# Allegro board CHZC-02.brd
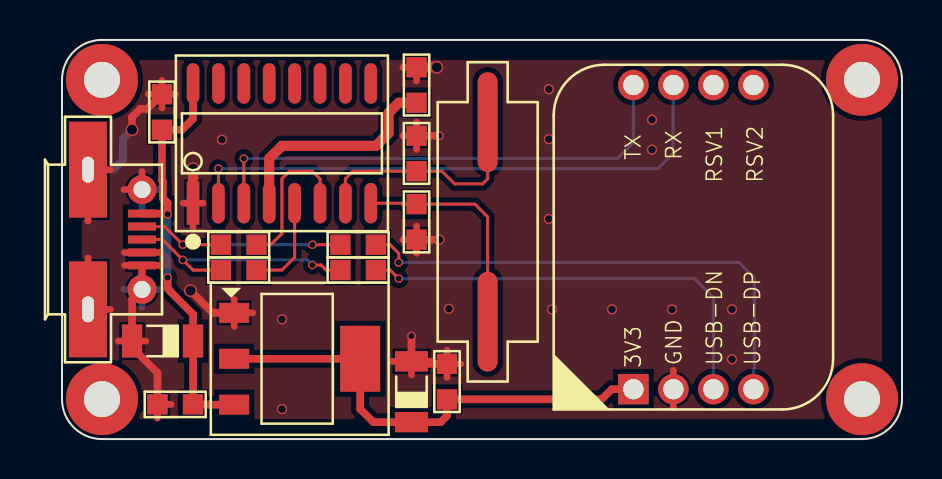
[diagram p0: board, top side]
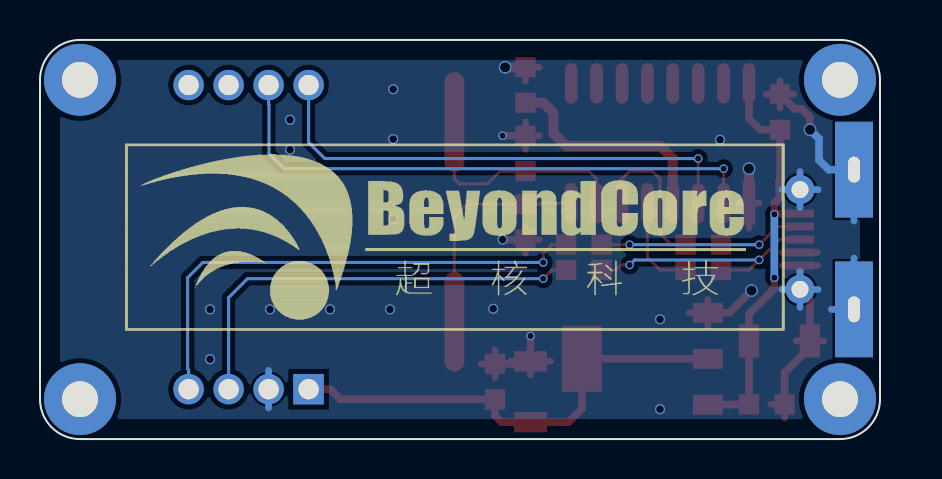
[diagram p1: board, bottom side, seen from below]

Outline 42 x 20 mm; copper layers: TOP, BOTTOM. Coordinates in mm from the lower left corner of the outline.
Outline path: 0,18 0,2 arc(0.59,0.59) 2,0 40,0 arc(41.41,0.59) 42,2 42,18 arc(41.41,19.41) 40,20 2,20 arc(0.59,19.41) 0,18

## Placement (name value [footprint] x y rotation side)
C1  100 nF  [SC0603]  5 15.5 90 top
C2  1 uF  [SC0603]  17.73 16.85 90 top
C3  22 pF  [SC0603]  17.73 15.2 270 top
C4  22 pF  [SC0603]  17.73 9.99 90 top
C5  22 uF/16V  [SC1206]  5.03 4.91 180 top
C6  100 nF  [SC0603]  6.55 1.74 180 top
C7  22 uF/16V  [SC1206]  17.47 2.37 90 top
C8  100 nF  [SC0603]  19.25 1.99 90 top
H1  OBLONG HOLE x 1.6mm  [M-3_6-D1_80-MM]  2 18 0 top
H2  OBLONG HOLE x 1.6mm  [M-3_6-D1_80-MM]  2 2 0 top
H3  OBLONG HOLE x 1.6mm  [M-3_6-D1_80-MM]  40 2 0 top
H4  OBLONG HOLE x 1.6mm  [M-3_6-D1_80-MM]  40 18 0 top
J1  MICRO-USB-B  [MICRO-USB-B-THU]  4 10 270 top
M1  CHZT-02  [CHZT-02-THU]  31.57 10.12 90 top
R1  0 R  [SR0603]  7.95 8.47 0 top
R2  0 R  [SR0603]  7.95 9.74 0 top
R3  DNP  [SR0603]  13.92 8.47 0 top
R4  DNP  [SR0603]  13.92 9.74 0 top
U1  CH340G  [SOP-16]  11 14.82 90 top
U2  AMS1117  [SOT223-3]  11.76 4.02 270 top
Y1  12 MHz  [HC-49SMD]  21.28 10.88 270 top

## Library data of the parts
C1-C4 C6 C8 = Capacity_Nonpolarity
C5 C7 = Capacity_TANT
H1-H4 = HOLE
J1 = MICRO-USB
M1 = CHZT-02
R1-R4 = Res
U1 = CH340G
U2 = AMS1117
Y1 = CRYSTAL

## Footprints (pads in the part's own frame, mm; a bottom-side part is the same pattern mirrored in y, then rotated)
CHZT-02-THU
  rect 1.524x1.524 hole 1.016: 1(-7.62,3)
  round 1.524 hole 1.016: 2(-7.62,1) 3(-7.62,-1) 4(-7.62,-3) 5(7.62,-3) 6(7.62,-1) 7(7.62,1) 8(7.62,3)
HC-49SMD
  oval 5x1 smd: 1(-5,0) 2(5,0)
M-3_6-D1_80-MM
  round 3.6 hole 1.8: 1(0,0)
MICRO-USB-B-THU
  rect 0.4x1.4 smd: 1(-1.3,0) 2(-0.65,0) 3(0,0) 4(0.65,0) 5(1.3,0)
  round 1.45 hole 0.85: 6(2.5,0) 9(-2.5,0)
  rect 4.8x1.9 hole 1.3x0.6: 7(3.5,-2.7) 8(-3.5,-2.7)
SC0603
  rect 1.016x1.016 smd: 1(0,0) 2(1.778,0)
SC1206
  rect 1.016x1.651 smd: 1(-1.524,0) 2(1.524,0)
SOP-16
  rect 2.159x0.635 smd: 1(-3,4.445)
  oval 2.032x0.635 smd: 2(-3,3.175) 3(-3,1.905) 4(-3,0.635) 5(-3,-0.635) 6(-3,-1.905) 7(-3,-3.175) 8(-3,-4.445) 9(3,-4.445) 10(3,-3.175) 11(3,-1.905) 12(3,-0.635) 13(3,0.635) 14(3,1.905) 15(3,3.175) 16(3,4.445)
SOT223-3
  rect 1x1.5 smd: 1(-2.3,-3.15) 2(0,-3.15) 3(2.3,-3.15)
  rect 3.3x2 smd: 4(0,3.15)
SR0603
  rect 1.016x1.016 smd: 1(0,0) 2(1.778,0)

## Nets
D3V3: C7.1(+) C8.1 M1.1(VCC) U2.2(VOUT) U2.4(OUT)
D5V: C1.1 C5.1(+) C6.1 J1.1(VBUS) U1.16(VCC) U2.3(VIN)
GND: C1.2 C2.2 C3.1 C4.1 C5.2(-) C6.2 C7.2(-) C8.2 J1.4(ID) J1.5(GND) J1.6 J1.7 J1.8 J1.9 M1.2(GND) U1.1(GND) U2.1(GND)
DN: J1.2(DN) R2.1 R4.1
DP: J1.3(DP) R1.1 R3.1
UART_RXD: M1.7(LVC33-RX) U1.2(TXD)
UART_TXD: M1.8(LVC33-TX) U1.3(RXD)
USB-DN: M1.4(USB-DM) R4.2
USB-DP: M1.3(USB-DP) R3.2
USB-UART-DN: R2.2 U1.6(USB-DN)
USB-UART-DP: R1.2 U1.5(USB-DP)
N07893: C3.2 U1.7(XI) Y1.1
N07937: C4.2 U1.8(XO) Y1.2
N08021: C2.1 U1.4(V3)

Pads without a net: H1 1; H2 1; H3 1; H4 1; M1 5 6; U1 9 10 11 12 13 14 15

## Via types
v1: diameter 0.432, hole 0.305, TOP to BOTTOM, 12 vias
v2: diameter 0.635, hole 0.508, TOP to BOTTOM, 4 vias
v3: diameter 0.508, hole 0.381, TOP to BOTTOM, 15 vias

## Routing (per net, layer and track width the routed paths; a pad name or vN(x,y) marks a point on that pad's centre or on a via; arc(x,y) is an arc through that point)
D3V3: length 23.9
  TOP w0.381: U2.2 U2.4 14.91,1.51 15.57,0.85 C7.1 18.93,0.85 19.25,1.17 C8.1 26.98,1.99 27.49,2.5 M1.1
D5V: length 21.3
  TOP w0.381: U1.16 6.55,16.05 6,15.5 C1.1 5,12.97 5.04,12.93 5.04,12.07 5.28,11.83 v1(5.28,11.26) 5.24,11.3 J1.1 ; v1(5.28,8.09) 5.28,7.55 5.41,7.43 5.41,7.4 6.55,6.26 C5.1 C6.1 7.38,1.74 7.39,1.72 U2.3
  BOTTOM w0.381: v1(5.28,8.09) v1(5.28,11.26)
GND: length 75
  TOP w0.33: 4,13.4 J1.9 3.1,12.5 ; 19.25,3.08 C8.2 ; C8.2 19.94,3.77 ; C8.2 19.25,4.46 ; U2.1 8.61,7 ; U2.1 8.61,5.65 ; U2.1 9.54,6.32 ; 4.88,8.7 J1.5 3.12,8.7 ; 1.3,9.08 J1.7 2.43,6.5 ; C4.1 17.73,10.68 ; C4.1 17.73,9.31 ; C4.1 17.04,9.99 ; 17.73,14.51 C3.1 ; C3.1 17.73,15.89 ; C3.1 17.04,15.2 ; 4.31,17.28 C1.2 ; C1.2 5.69,17.28 ; C1.2 5,16.59 ; C1.2 5,17.96 ; 6.55,10.56 U1.1 ; U1.1 6.06,11.82 ; U1.1 7.05,11.82 ; 30.57,1.56 M1.2 30.57,3.44 ; 1.3,10.92 J1.8 2.43,13.5 ; 17.73,17.94 C2.2 17.04,18.63 ; 5.46,1.74 C6.2 4.77,1.05 ; 4.19,4.91 C5.2 2.82,4.91 ; 16.47,3.9 C7.2 ; C7.2 18.48,3.9 ; C7.2 17.47,3.21 ; 3.12,9.35 J1.4 4.88,9.35
  TOP w0.381: C6.2 4.77,3.33 3.5,4.6 C5.2 3.5,7 J1.6 J1.5 ; C4.1 v3(18.87,9.99) ; C1.2 4.27,16.55 3.91,16.55 3.5,16.13 v2(3.5,15.5) ; C3.1 v1(18.87,15.2) ; v2(6.42,7.44) 7.54,6.32 U2.1 ; v1(17.47,5.17) C7.2 17.6,3.77 C8.2
  TOP w0.508: U1.1 v2(6.55,13.55) ; C2.2 v2(18.74,18.63)
  BOTTOM w0.33: 2.43,6.5 J1.7 1.3,9.08 ; 4,11.6 J1.9 ; J1.9 4,13.4 ; J1.9 3.1,12.5 ; J1.9 4.9,12.5 ; J1.6 4.9,7.5 ; J1.6 4,6.6 ; J1.6 4,8.4 ; J1.6 3.1,7.5 ; 1.3,10.92 J1.8 ; 30.57,1.56 M1.2 30.57,3.44
  BOTTOM w0.381: J1.8 2.57,13.5 3.05,13.98 3.05,15.05 v2(3.5,15.5)
  vias: v3(8,15) v3(11,6) v3(11,1.5) v3(19.34,6.53) v3(24.34,17.53) v3(24.34,15.03) v3(24.34,11.03) v3(24.5,6.5) v3(27.5,6.5) v3(29.5,16) v3(29.5,14.5) v3(30.5,6.5) v3(33.5,6.5) v3(33.5,4)
DN: length 12.2
  TOP w0.152: v1(12.52,9.74) R4.1 ; J1.2 5.13,10.65 v1(6.04,9.74) R2.1
  BOTTOM w0.152: v1(6.04,9.74) v1(12.52,9.74)
DP: length 12.7
  TOP w0.152: R3.1 13.21,8.47 12.95,8.72 v1(12.52,8.72) ; R1.1 6.55,8.47 v1(6.04,8.98) 5.02,10 J1.3
  BOTTOM w0.152: v1(6.04,8.98) 12.27,8.98 v1(12.52,8.72)
UART_RXD: length 28.2
  TOP w0.152: U1.2 v1(7.82,13.55)
  BOTTOM w0.152: M1.7 30.57,16.77 30.55,16.76 30.55,14.31 29.79,13.55 v1(7.82,13.55)
UART_TXD: length 24.9
  TOP w0.152: U1.3 v1(9.09,14.06)
  BOTTOM w0.152: v1(9.09,14.06) 27.76,14.06 28.57,14.87 M1.8
USB-DN: length 25.5
  TOP w0.152: v1(16.84,8.85) 16.84,9.31 16.41,9.74 R4.2
  BOTTOM w0.152: M1.4 34.57,3.47 34.62,3.51 34.62,8.09 33.86,8.85 v1(16.84,8.85)
USB-DP: length 22
  TOP w0.152: R3.2 16.41,8.47 v1(16.84,8.04)
  BOTTOM w0.152: v1(16.84,8.04) 31.62,8.04 32.57,7.09 M1.3
USB-UART-DN: length 7.7
  TOP w0.152: U1.6 12.9,13.04 12.52,13.42 11.38,13.42 11,13.04 11,10.3 10.44,9.74 R2.2
USB-UART-DP: length 4.9
  TOP w0.152: R1.2 11,8.47 11.63,9.1 U1.5
N07893: length 11.7
  TOP w0.152: Y1.1 21.28,13.04 21.03,12.79 19.63,12.79 19,13.42 C3.2 14.55,13.42 14.17,13.04 U1.7
N07937: length 11.4
  TOP w0.152: U1.8 16.97,11.82 17.02,11.77 C4.2 20.65,11.77 21.28,11.14 Y1.2
N08021: length 11.4
  TOP w0.508: U1.4 10.36,14.06 11,14.69 15.69,14.69 16.33,15.33 16.33,16.34 16.84,16.85 C2.1

## Copper pours and planes (outline as drawn; the poured copper is in the pictures)
GND on TOP: 2,19 1.29,18.71 1,18 1,2 1.29,1.29 2,1 40,1 40.71,1.29 41,2 41,18 40.71,18.71 40,19 ; 3 cut-outs
GND on BOTTOM: 2,19 1.29,18.71 1,18 1,2 1.29,1.29 2,1 40,1 40.71,1.29 41,2 41,18 40.71,18.71 40,19

## Text on the board
Board Geometry/Soldermask Top: WWW.BEYONDCORE.NET
COMPVAL_TYPE_TOP: ___ PUBI (PUBLIC INFORMATION) | ___ FIUO (FREESCALE INTERNAL USE ONLY) | ___ FCP (FREESCALE CONFIDENTIAL PROPRIETARY) | X
NCLEGEND-1-2: FIGURE | SIZE | 12.0 | 15.0 | 20.0 | 33.461 | 40.0 | 70.87 | 51.181x23.618 | DRILL CHART: TOP to BOTTOM | ALL UNITS ARE IN MILS | PLATED | QTY | 12 | 15 | 4 | 2 | 1 | 7
